# Altium PCB PCB1.PcbDoc
Units mm, origin at the board's own origin, x right, y up, seen from the top; angles counter-clockwise.
Board outline 90 x 44.87 mm, 2 copper layers (Top Layer, Bottom Layer); 37 components, 33 nets, 249 pads, 1 vias.
Unrouted connection lines stored in the file: 27.
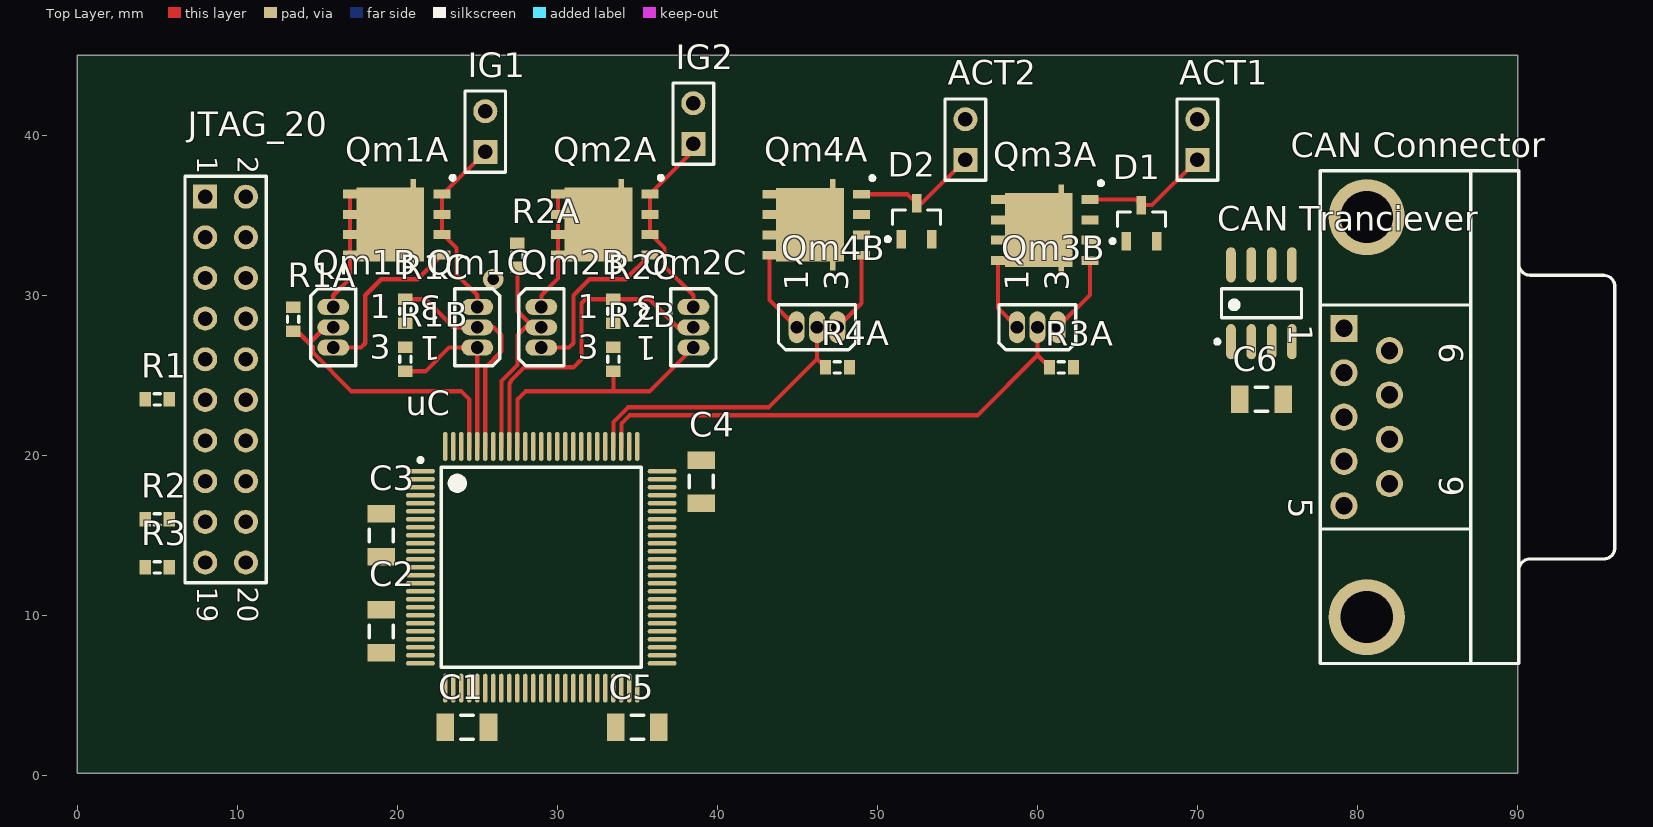
[diagram p0: Top Layer view]
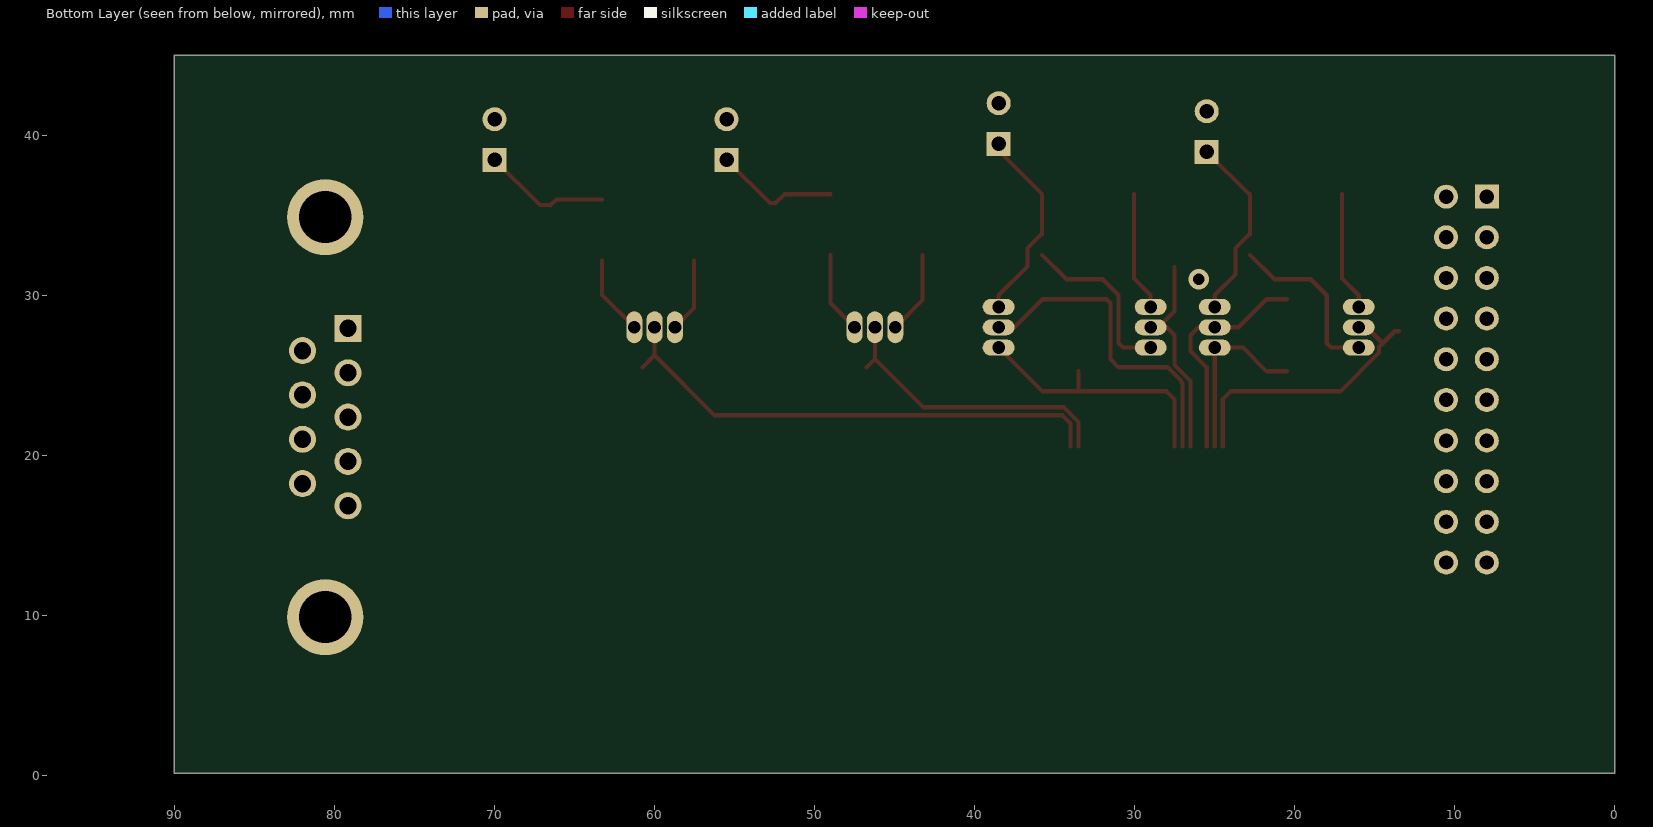
[diagram p1: Bottom Layer view, seen from below]

## Layer stack, top to bottom
Top Solder: solder mask 0.0102, Solder Resist, Dk 3.5
Top Layer: signal copper 0.0356
Dielectric 1: dielectric 0.32, FR-4, Dk 4.8
Bottom Layer: signal copper 0.0356
Bottom Solder: solder mask 0.0102, Solder Resist, Dk 3.5

## Board outline
0,0.127 90,0.127 90,45 0,45

## Design rules (kind name [scope] priority, off if disabled: settings)
Clearance [All] p1: gap=0.15
PolygonConnect [All] p1: connectstyle=Relief reliefconductorwidth=0.254 reliefentries=4 polygonreliefangle="90 Angle" airgapwidth=0.254
RoutingCorners [All] p1: cornerstyle=45-Degree minsetback=2.5 maxsetback=2.5
RoutingVias [All] p1: holewidth=0.711 width=1.27 viastyle="Through Hole" minholewidth=0.711 minwidth=1.27 maxholewidth=0.711 maxwidth=1.27
SolderMaskExpansion [All] p1: expansion=0.102
Width [All] p1: maxlimit=0.25 minlimit=0.25 preferedwidth=0.25
Width HighC [InNet('ACT 12V')] p2: maxlimit=1.5 minlimit=1.5 preferedwidth=1.5
29 further rules are at their usual default settings.

## Classes and differential pairs
component class Sheet1: C1 C2 C3 C4 C5 C6 "CAN Connector" "CAN Tranciever" JTAG_20 R1 R2 R3 uC
component class Actuators: ACT1 ACT2 D1 D2 IG1 IG2 Qm1A Qm1B Qm1C Qm2A Qm2B Qm2C Qm3A Qm3B Qm4A Qm4B R1A R1B R1C R2A R2B R2C R3A R4A

## Components (designator, comment, footprint, x,y, rotation, side; value= is the part's Value field where it differs from the comment)
ACT1 "Header 2" HDR1X2 70,38.46 r90 top
ACT2 "Header 2" HDR1X2 55.5,38.46 r90 top
C1 "Cap Semi" C1206 24.35,3 r180 top
C2 "Cap Semi" C1206 19,9 r90 top
C3 "Cap Semi" C1206 19,15 r90 top
C4 "Cap Semi" C1206 39,18.35 r270 top
C5 "Cap Semi" C1206 35,3 r180 top
C6 "Cap Semi" C1206 74,23.5 r180 top
"CAN Connector" "D Connector 9" DSUB1.385-2H9 90.08,22.385 r270 top
"CAN Tranciever" "MCP2551-I/SN" SOIC-SN8_N 74,29.5 r90 top
D1 "Diode BAS116" SOT-23_N 66.5,34.5 r90 top
D2 "Diode BAS116" SOT-23_N 52.45,34.625 r90 top
IG1 "Header 2" HDR1X2 25.5,38.96 r90 top
IG2 "Header 2" HDR1X2 38.5,39.46 r90 top
JTAG_20 "Header 10X2" HDR2X10 8,36.16 r270 top
Qm1A "MCP87018T-U/MF" MCHP-PDFN-MF8_V 19.91,34.42 r270 top
Qm1B "MOSFET-N" E3 16,28 r0 top
Qm1C "MOSFET-N" E3 25,28 r180 top
Qm2A "MCP87018T-U/MF" MCHP-PDFN-MF8_V 32.91,34.42 r270 top
Qm2B "MOSFET-N" E3 29,28 r0 top
Qm2C "MOSFET-N" E3 38.5,28 r180 top
Qm3A "MCP87018T-U/MF" MCHP-PDFN-MF8_V 60.41,34.08 r270 top
Qm3B "MOSFET-N" E3 60,28 r90 top
Qm4A "MCP87018T-U/MF" MCHP-PDFN-MF8_V 46.125,34.405 r270 top
Qm4B "MOSFET-N" E3 46.23,28 r90 top
R1 "RTCK PD" J1-0603 5,23.5 r0 top
R1A "Res3" J1-0603 13.5,28.5 r270 top
R1B "Res3" J1-0603 20.5,26 r90 top
R1C "Res3" J1-0603 20.5,29 r90 top
R2 "DBGRQ PD" J1-0603 5,16 r0 top
R2A "Res3" J1-0603 27.5,32.5 r270 top
R2B "Res3" J1-0603 33.5,26 r90 top
R2C "Res3" J1-0603 33.5,29 r90 top
R3 "DBGACK PD" J1-0603 5,13 r0 top
R3A "Res3" J1-0603 61.5,25.5 r180 top
R4A "Res3" J1-0603 47.5,25.5 r180 top
uC "STM32F103V8T6" STM-LQFP100_N 29,13 r0 top

## Footprints (in the part's own frame and the unit in brackets; to place one, negate y for a bottom-side part, rotate by r counter-clockwise, add the part's x,y. Pads: shape width x height; smd on the part's side, far side on the other; paste and mask are expansions set on the pad)
C1206 [mm] "Chip Capacitor, Body 3.2x1.6mm, IPC High Density"
  rect 1.1x1.7 smd: 1(-1.35,0) 2(1.35,0)
  silkscreen extent -0.4,-0.75 0.4,0.75, body extent -1.7,-0.9 1.7,0.9, height 1.3
DSUB1.385-2H9 [mm] "Connector; D Subminiature; 9 Position; Right Angle; Pitch 1.385 mm"
  rect 1.69x1.69 hole 1.09: 1(-5.54,-10.92)
  round 1.69 hole 1.09: 2(-2.77,-10.92) 3(0,-10.92) 4(2.77,-10.92) 5(5.54,-10.92) 6(-4.155,-8.08) 7(-1.385,-8.08) 8(1.385,-8.08) 9(4.155,-8.08)
  round 4.76 hole 3.26: 10(-12.495,-9.5) 11(12.495,-9.5)
  silkscreen extent -15.4,-12.4 15.4,6
E3 [mm] "TO, Flat Index; 3 In-Line, Axial Leads; Body Dia. 4.6mm; Lead Dia. 0.5 mm (max)"
  oval 2x1 hole 0.8: 1(0,1.27) 2(0,0) 3(0,-1.27)
  silkscreen extent -1.41,-2.41 1.41,2.41
HDR1X2 [mm] "Connector; Header; 2 Position"
  rect 1.5x1.5 hole 0.9: 1(0,0)
  round 1.5 hole 0.9: 2(2.54,0)
  silkscreen extent -1.27,-1.27 3.81,1.27
HDR2X10 [mm] "Connector; Header; 10x2 Position"
  rect 1.5x1.5 hole 0.9: 1(0,0)
  round 1.5 hole 0.9: 2(0,2.54) 3(2.54,0) 4(2.54,2.54) 5(5.08,0) 6(5.08,2.54) 7(7.62,0) 8(7.62,2.54) 9(10.16,0) 10(10.16,2.54) 11(12.7,0) 12(12.7,2.54) 13(15.24,0) 14(15.24,2.54) 15(17.78,0) 16(17.78,2.54) 17(20.32,0) 18(20.32,2.54) 19(22.86,0) 20(22.86,2.54)
  silkscreen extent -1.27,-1.27 24.13,3.81
J1-0603 [mm] "Chip Resistor, Body 1.6x0.8mm, IPC High Density"
  rect 0.7x0.9 smd: 1(-0.75,0) 2(0.75,0)
  silkscreen extent -0.2,-0.35 0.2,0.35, body extent -0.85,-0.48 0.85,0.48, height 0.9
MCHP-PDFN-MF8_V [mm] "PDFN, 8-Leads, Body 6x5mm, Pitch 1.27mm"
  rect 0.56x1.06 smd: 1(-1.905,2.875) 2(-0.635,2.875) 3(0.635,2.875) 4(1.905,2.875)
  rect 0.56x0.86 smd: 5(1.905,-2.875) 6(0.635,-2.875) 7(-0.635,-2.875) 8(-1.905,-2.875)
  rect 4.62x4.22 smd: 9(0,-0.335)
  rect 0.54x0.35 smd: ""(-2.58,1.09) ""(2.58,1.09)
  silkscreen extent -3.04,3.43 -2.79,3.68, body extent -2.5,-3 2.5,3, height 1.03
SOIC-SN8_N [mm] "SOIC, 8-Leads, Body 4.9x3.8mm, Pitch 1.27mm, IPC Medium Density"
  oval 2.2x0.6 smd: 1(-2.4,1.905) 2(-2.4,0.635) 3(-2.4,-0.635) 4(-2.4,-1.905) 5(2.4,-1.905) 6(2.4,-0.635) 7(2.4,0.635) 8(2.4,1.905)
  silkscreen extent -2.52,-2.5 0.9,2.88, body extent -2,-2.5 2,2.5, height 1.75
SOT-23_N [mm] "SOT23, 3-Leads, Body 2.9x1.3mm, Pitch 0.95mm, Lead Span 2.5mm, IPC Medium Density"
  rect 1.15x0.6 smd: 1(-1.125,0.95) 2(-1.125,-0.95) 3(1.125,0)
  silkscreen extent -1.25,-1.5 0.7,1.92, body extent -0.7,-1.5 0.7,1.5, height 1.1
STM-LQFP100_N [mm] "Thin QFP, 100-Leads, Body 14x14mm, Pitch 0.5mm, IPC Medium Density"
  oval 1.8x0.3 smd: 1(-7.55,6) 2(-7.55,5.5) 3(-7.55,5) 4(-7.55,4.5) 5(-7.55,4) 6(-7.55,3.5) 7(-7.55,3) 8(-7.55,2.5) 9(-7.55,2) 10(-7.55,1.5) 11(-7.55,1) 12(-7.55,0.5) 13(-7.55,0) 14(-7.55,-0.5) 15(-7.55,-1) 16(-7.55,-1.5) 17(-7.55,-2) 18(-7.55,-2.5) 19(-7.55,-3) 20(-7.55,-3.5) 21(-7.55,-4) 22(-7.55,-4.5) 23(-7.55,-5) 24(-7.55,-5.5) 25(-7.55,-6) 51(7.55,-6) 52(7.55,-5.5) 53(7.55,-5) 54(7.55,-4.5) 55(7.55,-4) 56(7.55,-3.5) 57(7.55,-3) 58(7.55,-2.5) 59(7.55,-2) 60(7.55,-1.5) 61(7.55,-1) 62(7.55,-0.5) 63(7.55,0) 64(7.55,0.5) 65(7.55,1) 66(7.55,1.5) 67(7.55,2) 68(7.55,2.5) 69(7.55,3) 70(7.55,3.5) 71(7.55,4) 72(7.55,4.5) 73(7.55,5) 74(7.55,5.5) 75(7.55,6)
  oval 0.3x1.8 smd: 26(-6,-7.55) 27(-5.5,-7.55) 28(-5,-7.55) 29(-4.5,-7.55) 30(-4,-7.55) 31(-3.5,-7.55) 32(-3,-7.55) 33(-2.5,-7.55) 34(-2,-7.55) 35(-1.5,-7.55) 36(-1,-7.55) 37(-0.5,-7.55) 38(0,-7.55) 39(0.5,-7.55) 40(1,-7.55) 41(1.5,-7.55) 42(2,-7.55) 43(2.5,-7.55) 44(3,-7.55) 45(3.5,-7.55) 46(4,-7.55) 47(4.5,-7.55) 48(5,-7.55) 49(5.5,-7.55) 50(6,-7.55) 76(6,7.55) 77(5.5,7.55) 78(5,7.55) 79(4.5,7.55) 80(4,7.55) 81(3.5,7.55) 82(3,7.55) 83(2.5,7.55) 84(2,7.55) 85(1.5,7.55) 86(1,7.55) 87(0.5,7.55) 88(0,7.55) 89(-0.5,7.55) 90(-1,7.55) 91(-1.5,7.55) 92(-2,7.55) 93(-2.5,7.55) 94(-3,7.55) 95(-3.5,7.55) 96(-4,7.55) 97(-4.5,7.55) 98(-5,7.55) 99(-5.5,7.55) 100(-6,7.55)
  silkscreen extent -7.67,-6.25 6.25,6.82, body extent -7,-7 7,7, height 1.6

## Part data
ACT1 ACT2 IG1 IG2: "Header, 2-Pin"
C1 C2 C3 C4 C5 C6: "Capacitor (Semiconductor SIM Model)"
"CAN Connector": "Receptacle Assembly, 9 Position, Right Angle"
"CAN Tranciever": "High-Speed CAN Transceiver, 8-Pin SOIC, Industrial Temperature"
D1 D2: "Silicon Low Leakage Diode"
JTAG_20: "Header, 10-Pin, Dual row"
Qm1A Qm2A Qm3A Qm4A: "High-Speed N-Channel Power MOSFET, Single Configuration, 25 V, -55 to 150 degC, 8-pin PDFN (MF8), Tape and Reel"
Qm1B Qm1C Qm2B Qm2C Qm3B Qm4B: "N-Channel MOSFET"
R1 R2 R3: library part Res3, "Resistor"
R1A R1B R1C R2A R2B R2C R3A R4A: "Resistor"
uC: "ARM Cortex-M3 32-bit MCU, 64 KB Flash, 20 KB Internal RAM, 80 I/Os, 100-pin LQFP, -40 to 85 degC, Tray"

## Via types
v1: diameter 1.27, hole 0.711, Top Layer to Bottom Layer, 1 vias

## Nets (pads, with @x,y where several pads share a name; then routed paths per layer and width w, separated by ;. In a path a pad name is that pad's centre, name@x,y a point inside that pad or via, vN(x,y) a via of type N, cw(c..) or ccw(c..) an arc to the next point about the centre after c; other vN are vias at no path point)
"ACT 12V": Qm1A.5 Qm1A.6 Qm1A.7 Qm1A.8 Qm1B.1 Qm2A.5 Qm2A.6 Qm2A.7 Qm2A.8 Qm2B.1 Qm3A.5 Qm3A.6 Qm3A.7 Qm3A.8 Qm3B.1 Qm4A.5 Qm4A.6 Qm4A.7 Qm4A.8 Qm4B.1 | length 24.8
  Top Layer w0.25: Qm1A.5 Qm1A.6 Qm1A.7 Qm1A.8 ; Qm2A.5 Qm2A.6 Qm2A.7 Qm2A.8
  Top Layer w0.254: Qm1B.1 16,30 17.035,31.035 Qm1A.5 ; Qm2B.1 29,30 30.035,31.035 Qm2A.5 ; Qm4A.5 43.25,29.71 Qm4B.1 ; Qm3A.5 57.535,29.195 Qm3B.1
"CAN 5V": "CAN Tranciever.3" C6.1
GND: "CAN Connector.6" "CAN Connector.9" "CAN Tranciever.2" "CAN Tranciever.8" ACT1.2 ACT2.2 C1.2 C2.2 C3.2 C4.2 C5.2 C6.2 D1.1 D2.1 IG1.2 IG2.2 JTAG_20.4 JTAG_20.6 JTAG_20.8 JTAG_20.10 JTAG_20.12 JTAG_20.14 JTAG_20.16 JTAG_20.18 JTAG_20.20 R1.1 R1A.1 R1C.1 R2.1 R2A.1 R2C.1 R3.1 R3A.1 R4A.1 uC.10 uC.12 uC.19 uC.20 uC.27 uC.49 uC.74 uC.94 uC.99
NetACT1_1: ACT1.1 D1.3 Qm3A.1 Qm3A.2 Qm3A.3 | length 8
  Top Layer w0.25: D1.3 67.165,35.625 ACT1.1
  Top Layer w0.254: Qm3A.1 66.14,35.985 D1.3
NetACT2_1: ACT2.1 D2.3 Qm4A.1 Qm4A.2 Qm4A.3 | length 7.9
  Top Layer w0.25: D2.3 52.79,35.75 ACT2.1
  Top Layer w0.254: Qm4A.1 51.89,36.31 D2.3
"NetCAN Connector_2": "CAN Connector.2" "CAN Tranciever.6"
"NetCAN Connector_7": "CAN Connector.7" "CAN Tranciever.7"
"NetCAN Tranciever_1": "CAN Tranciever.1" uC.71
"NetCAN Tranciever_4": "CAN Tranciever.4" uC.70
NetIG1_1: IG1.1 Qm1A.1 Qm1A.2 Qm1A.3 Qm1C.3 | length 11.8
  Top Layer w0.25: Qm1A.1 22.865,36.325 IG1.1
  Top Layer w0.254: Qm1A.1 Qm1A.2 Qm1A.3 22.864,33.785 23.696,32.953 23.696,31.304 25,30 Qm1C.3
NetIG2_1: IG2.1 Qm2A.1 Qm2A.2 Qm2A.3 Qm2C.3 | length 12.5
  Top Layer w0.25: Qm2A.1 38.5,39.04 IG2.1
  Top Layer w0.254: Qm2A.1 Qm2A.2 Qm2A.3 35.858,33.785 36.692,32.951 36.692,31.808 38.5,30 Qm2C.3
NetJTAG_20_3: JTAG_20.3 uC.90
NetJTAG_20_5: JTAG_20.5 uC.77
NetJTAG_20_7: JTAG_20.7 uC.72
NetJTAG_20_9: JTAG_20.9 uC.76
NetJTAG_20_11: JTAG_20.11 R1.2
NetJTAG_20_13: JTAG_20.13 uC.89
NetJTAG_20_15: JTAG_20.15 uC.14
NetJTAG_20_17: JTAG_20.17 R2.2
NetJTAG_20_19: JTAG_20.19 R3.2
NetQm1A_4: Qm1A.4 Qm1B.3 | length 11.5
  Top Layer w0.254: Qm1B.3@16.389,27.119 Qm1B.3 17.73,26.73 18,27 18,30 19,31 21.27,31 Qm1A.4
NetQm1B_2: Qm1B.2 R1A.2 uC.97 | length 17.8
  Top Layer w0.254: R1A.2 13.75,27.75 14.5,27 ; Qm1B.2 15.5,28 14.5,27 ; uC.97 24.5,23.5 24,24 17.131,24 14.723,26.408 14.723,26.777 14.5,27
NetQm1C_1: Qm1C.1 R1B.1 uC.96 | length 11.3
  Top Layer w0.254: R1B.1 21.75,25.25 23.23,26.73 Qm1C.1 uC.96
NetQm1C_2: Qm1C.2 R1C.2 uC.95 | length 14.3
  Top Layer w0.254: R1C.2 21.75,29.75 23.5,28 Qm1C.2 26,28 26.5,27.5 26.5,26.5 25.5,25.5 uC.95
NetQm2A_4: Qm2A.4 Qm2B.3 | length 10.9
  Top Layer w0.254: Qm2B.3 30.73,26.73 31,27 31,30 32,31 34.27,31 Qm2A.4
NetQm2B_2: Qm2B.2 R2A.2 uC.93 | length 13.2
  Top Layer w0.254: uC.93 26.5,24.643 27.5,25.643 27.5,27.5 28,28 Qm2B.2@28.5,28 ; R2A.2 27.5,29 Qm2B.2@28.5,28 ; Qm2B.2 Qm2B.2@28.5,28
NetQm2C_1: Qm2C.1 R2B.1 uC.91 | length 17.3
  Top Layer w0.254: uC.91 27.5,23.5 28,24 33.5,24 ; R2B.1 33.5,24 ; Qm2C.1@37.77,26.73 Qm2C.1 35.77,24 33.5,24
NetQm2C_2: Qm2C.2 R2C.2 uC.92 | length 20.4
  Top Layer w0.254: uC.92 27,24.5 27.096,24.596 27.096,24.667 27.929,25.5 31,25.5 31.5,26 31.5,29.5 31.75,29.75 R2C.2 35.75,29.75 37.5,28 Qm2C.2
NetQm3A_4: Qm3A.4 Qm3B.3 | length 5
  Top Layer w0.254: Qm3B.3 63.285,30.015 Qm3A.4
NetQm3B_2: Qm3B.2 R3A.2 uC.78 | length 32
  Top Layer w0.254: uC.78 34,22 34.5,22.5 56.25,22.5 60,26.25 ; Qm3B.2 60,26.25 ; R3A.2 60,26.25
NetQm4A_4: Qm4A.4 Qm4B.3 | length 5.1
  Top Layer w0.254: Qm4B.3 49,29.5 Qm4A.4
NetQm4B_2: Qm4B.2 R4A.2 uC.79 | length 18.6
  Top Layer w0.254: uC.79 33.5,22.071 34.429,23 43.21,23 46.23,26.02 ; Qm4B.2 46.23,26.02 ; R4A.2 46.23,26.02
VCC: C1.1 C2.1 C3.1 C4.1 C5.1 JTAG_20.1 JTAG_20.2 R1B.2 R2B.2 uC.11 uC.21 uC.22 uC.28 uC.50 uC.75 uC.100
pads on no net: "CAN Connector.1" "CAN Connector.3" "CAN Connector.4" "CAN Connector.5" "CAN Connector.8" "CAN Connector.10" "CAN Connector.11" "CAN Tranciever.5" D1.2 D2.2 Qm1A. Qm1A.9 Qm2A. Qm2A.9 Qm3A. Qm3A.9 Qm4A. Qm4A.9 uC.1 uC.2 uC.3 uC.4 uC.5 uC.6 uC.7 uC.8 uC.9 uC.13 uC.15 uC.16 uC.17 uC.18 uC.23 uC.24 uC.25 uC.26 uC.29 uC.30 uC.31 uC.32 uC.33 uC.34 uC.35 uC.36 uC.37 uC.38 uC.39 uC.40 uC.41 uC.42 uC.43 uC.44 uC.45 uC.46 uC.47 uC.48 uC.51 uC.52 uC.53 uC.54 uC.55 uC.56 uC.57 uC.58 uC.59 uC.60 uC.61 uC.62 uC.63 uC.64 uC.65 uC.66 uC.67 uC.68 uC.69 uC.73 uC.80 uC.81 uC.82 uC.83 uC.84 uC.85 uC.86 uC.87 uC.88 uC.98
copper on no net:
  other v1: 26,31

## Text inside footprints (layer, text, board x,y; h text height)
"CAN Connector": Top Overlay "1" at 75.705,28.175 h1.5 r270; Top Overlay "5" at 75.705,17.345 h1.5 r270; Top Overlay "9" at 85.105,18.73 h1.5 r270; Top Overlay "6" at 85.105,27.04 h1.5 r270
JTAG_20: Top Overlay "2" at 10.032,38.7 h1.27 r270; Top Overlay "1" at 7.492,38.7 h1.27 r270; Top Overlay "19" at 7.492,11.776 h1.27 r270; Top Overlay "20" at 10.032,11.776 h1.27 r270
Qm1B: Top Overlay "3" at 18.275,26.037 h1.5; Top Overlay "1" at 18.275,28.555 h1.5
Qm1C: Top Overlay "3" at 22.725,29.963 h1.5 r180; Top Overlay "1" at 22.725,27.445 h1.5 r180
Qm2B: Top Overlay "3" at 31.275,26.037 h1.5; Top Overlay "1" at 31.275,28.555 h1.5
Qm2C: Top Overlay "3" at 36.225,29.963 h1.5 r180; Top Overlay "1" at 36.225,27.445 h1.5 r180
Qm3B: Top Overlay "3" at 61.963,30.275 h1.5 r90; Top Overlay "1" at 59.445,30.275 h1.5 r90
Qm4B: Top Overlay "3" at 48.193,30.275 h1.5 r90; Top Overlay "1" at 45.675,30.275 h1.5 r90